# Altium PCB IRIS-FE-01-B.PcbDoc (part 1 of 2)
Units mil, origin at the board's own origin, x right, y up, seen from the top; angles counter-clockwise.
Board outline 2000 x 1540 mil, 6 copper layers (Top Layer 1, GND Plane 2, RF Layer 3, GND Plane 4, Signal Layer 5, Bottom Layer 6), stack 58.468 mil thick; 79 components, 85 nets, 421 pads, 413 vias.
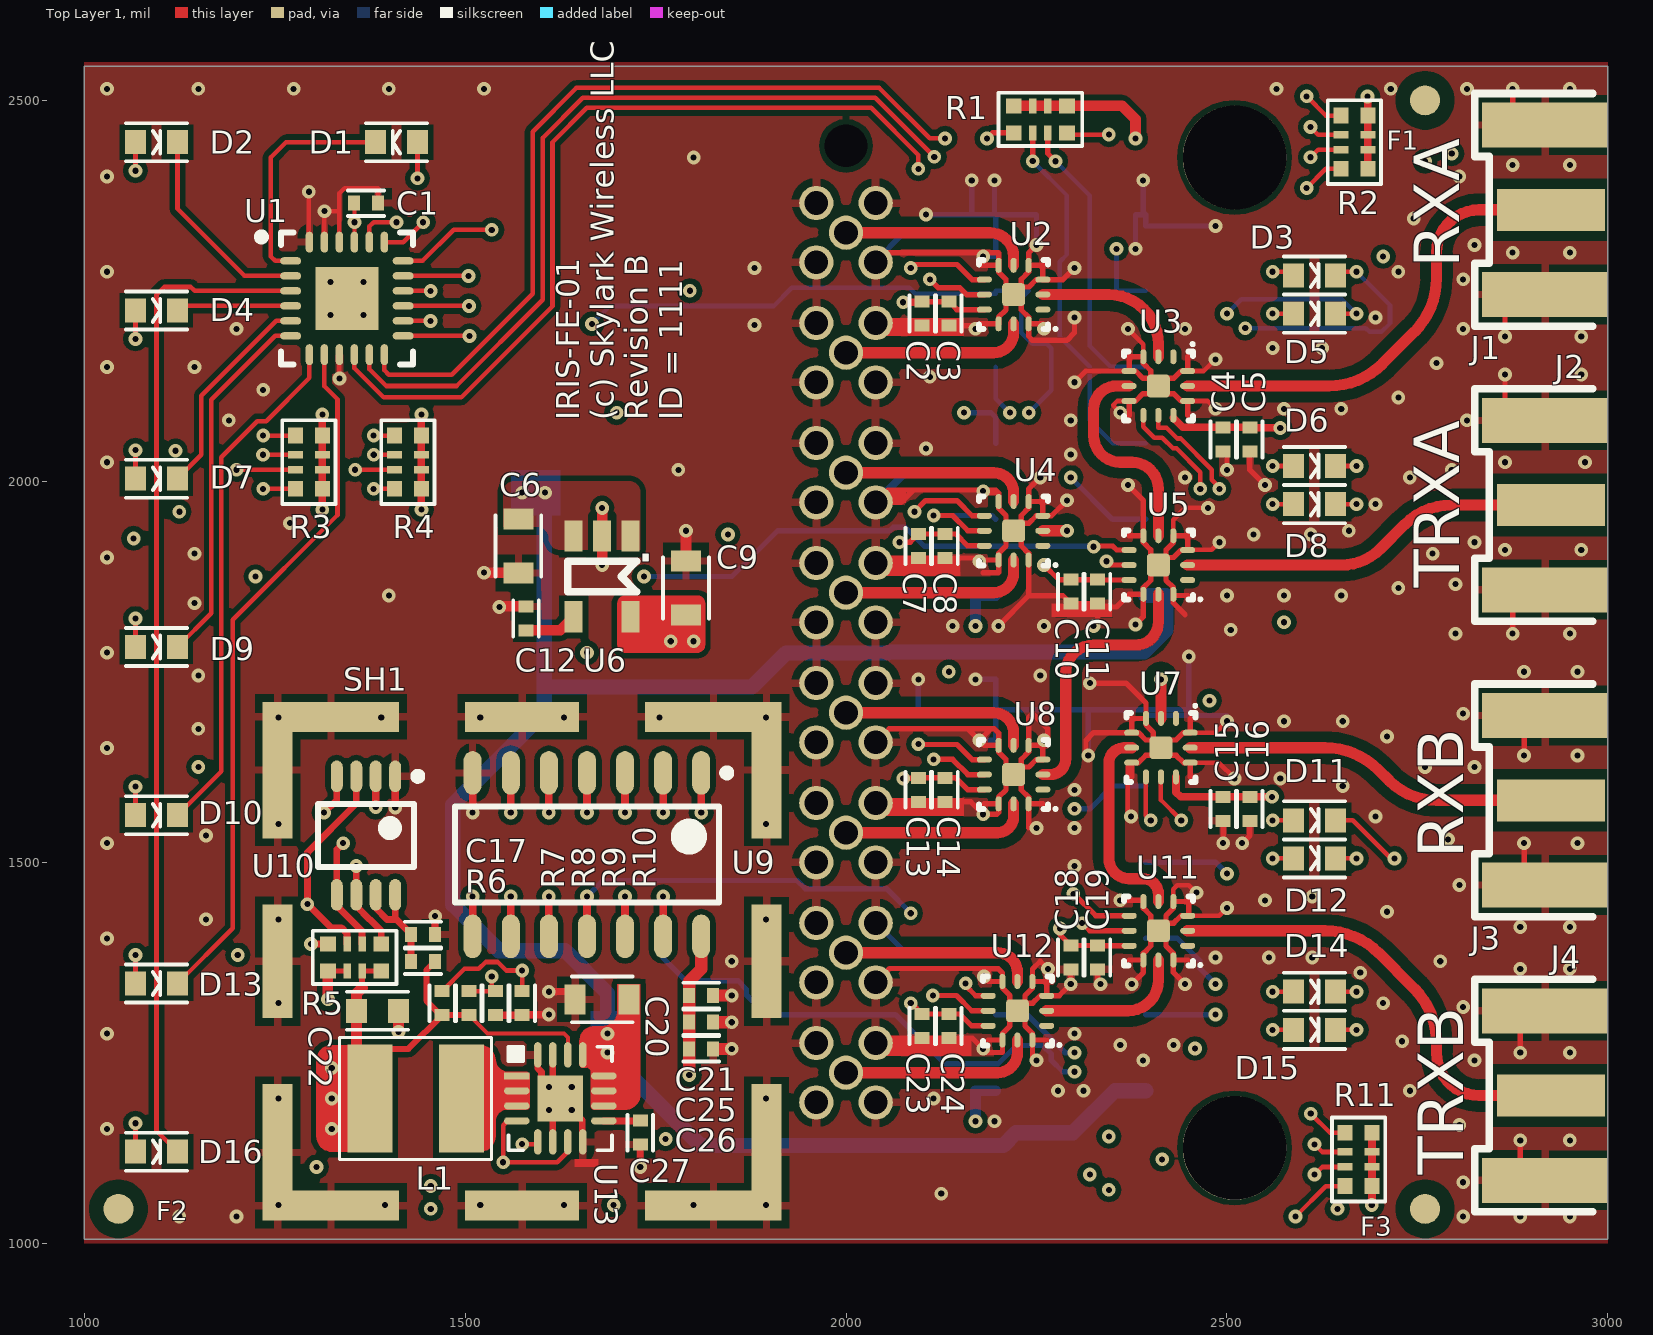
[diagram p0: Top Layer 1 view]
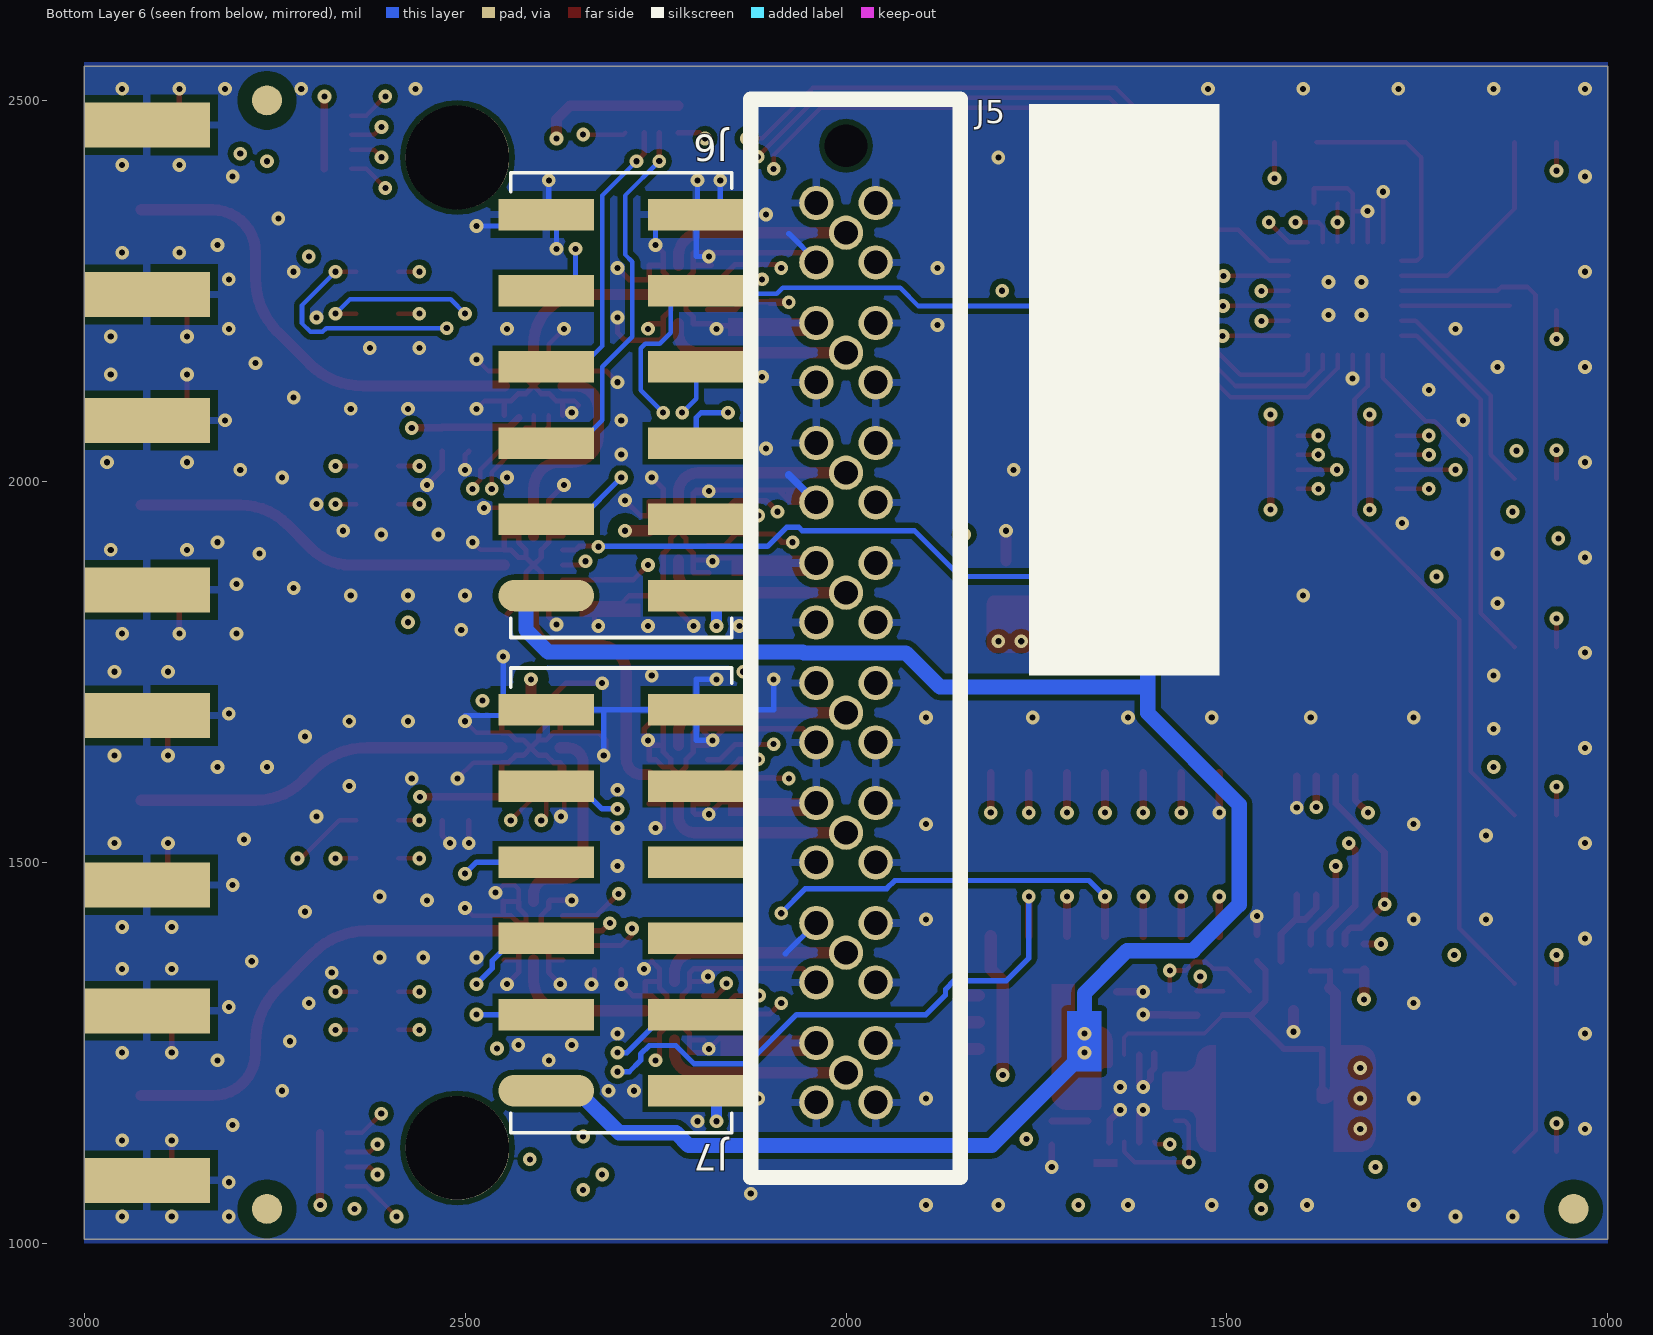
[diagram p1: Bottom Layer 6 view, seen from below]
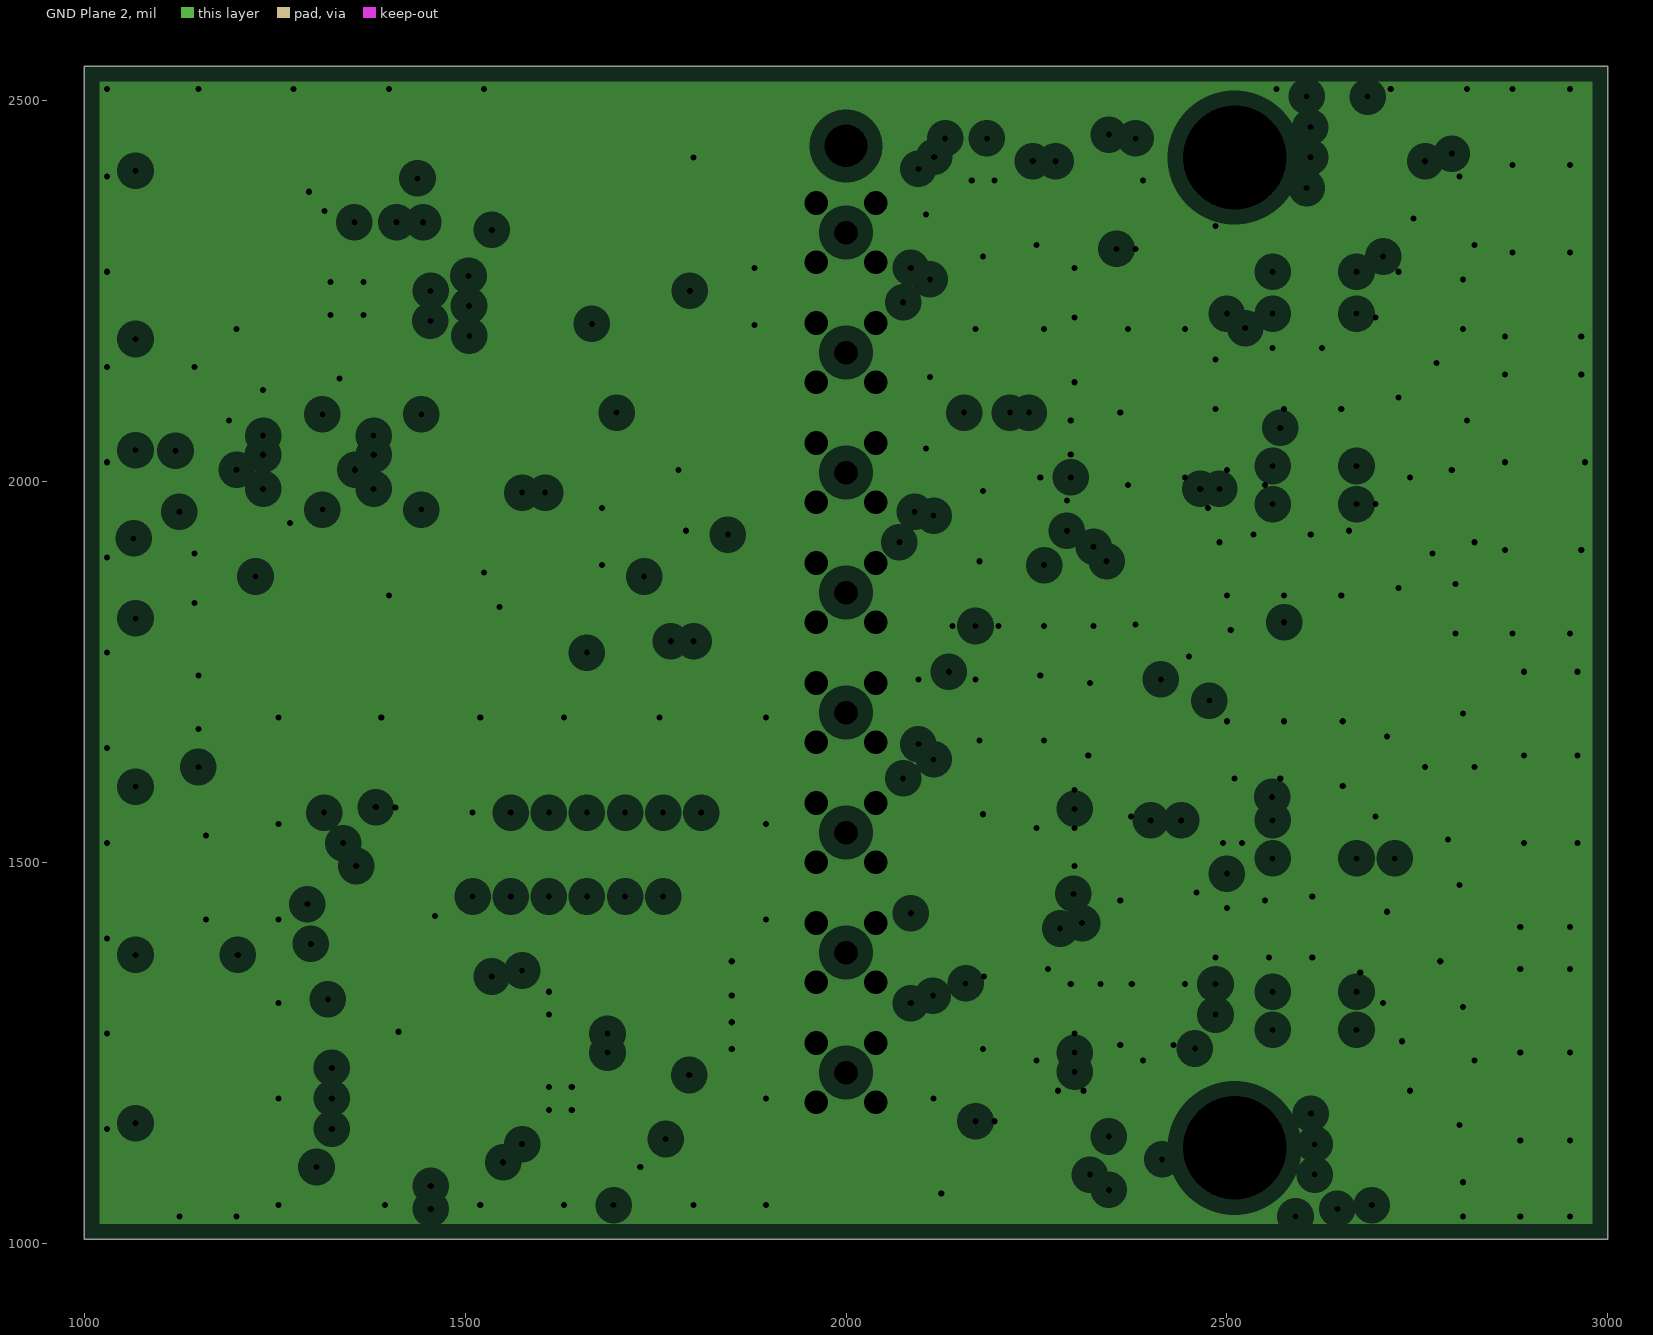
[diagram p2: GND Plane 2, clearances drawn from the general rule]
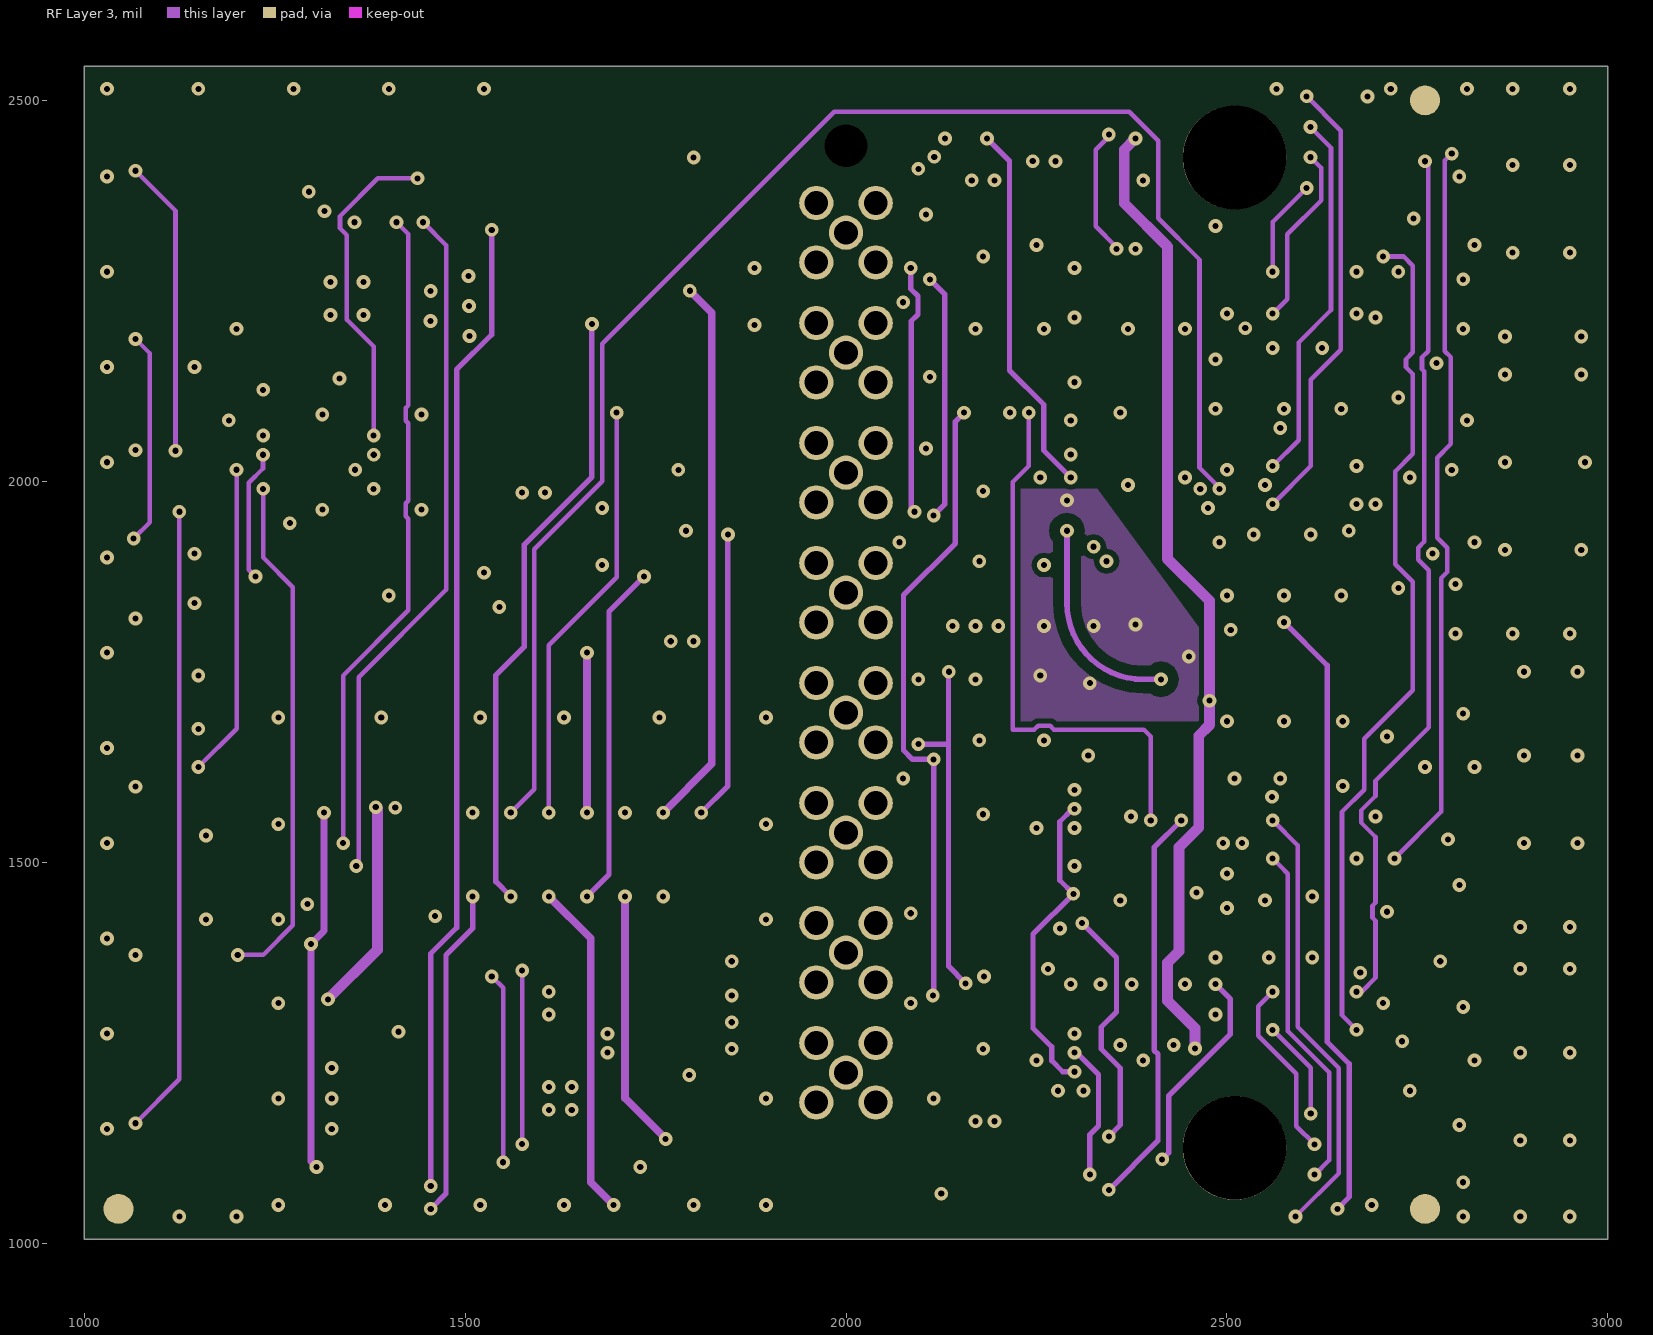
[diagram p3: RF Layer 3]
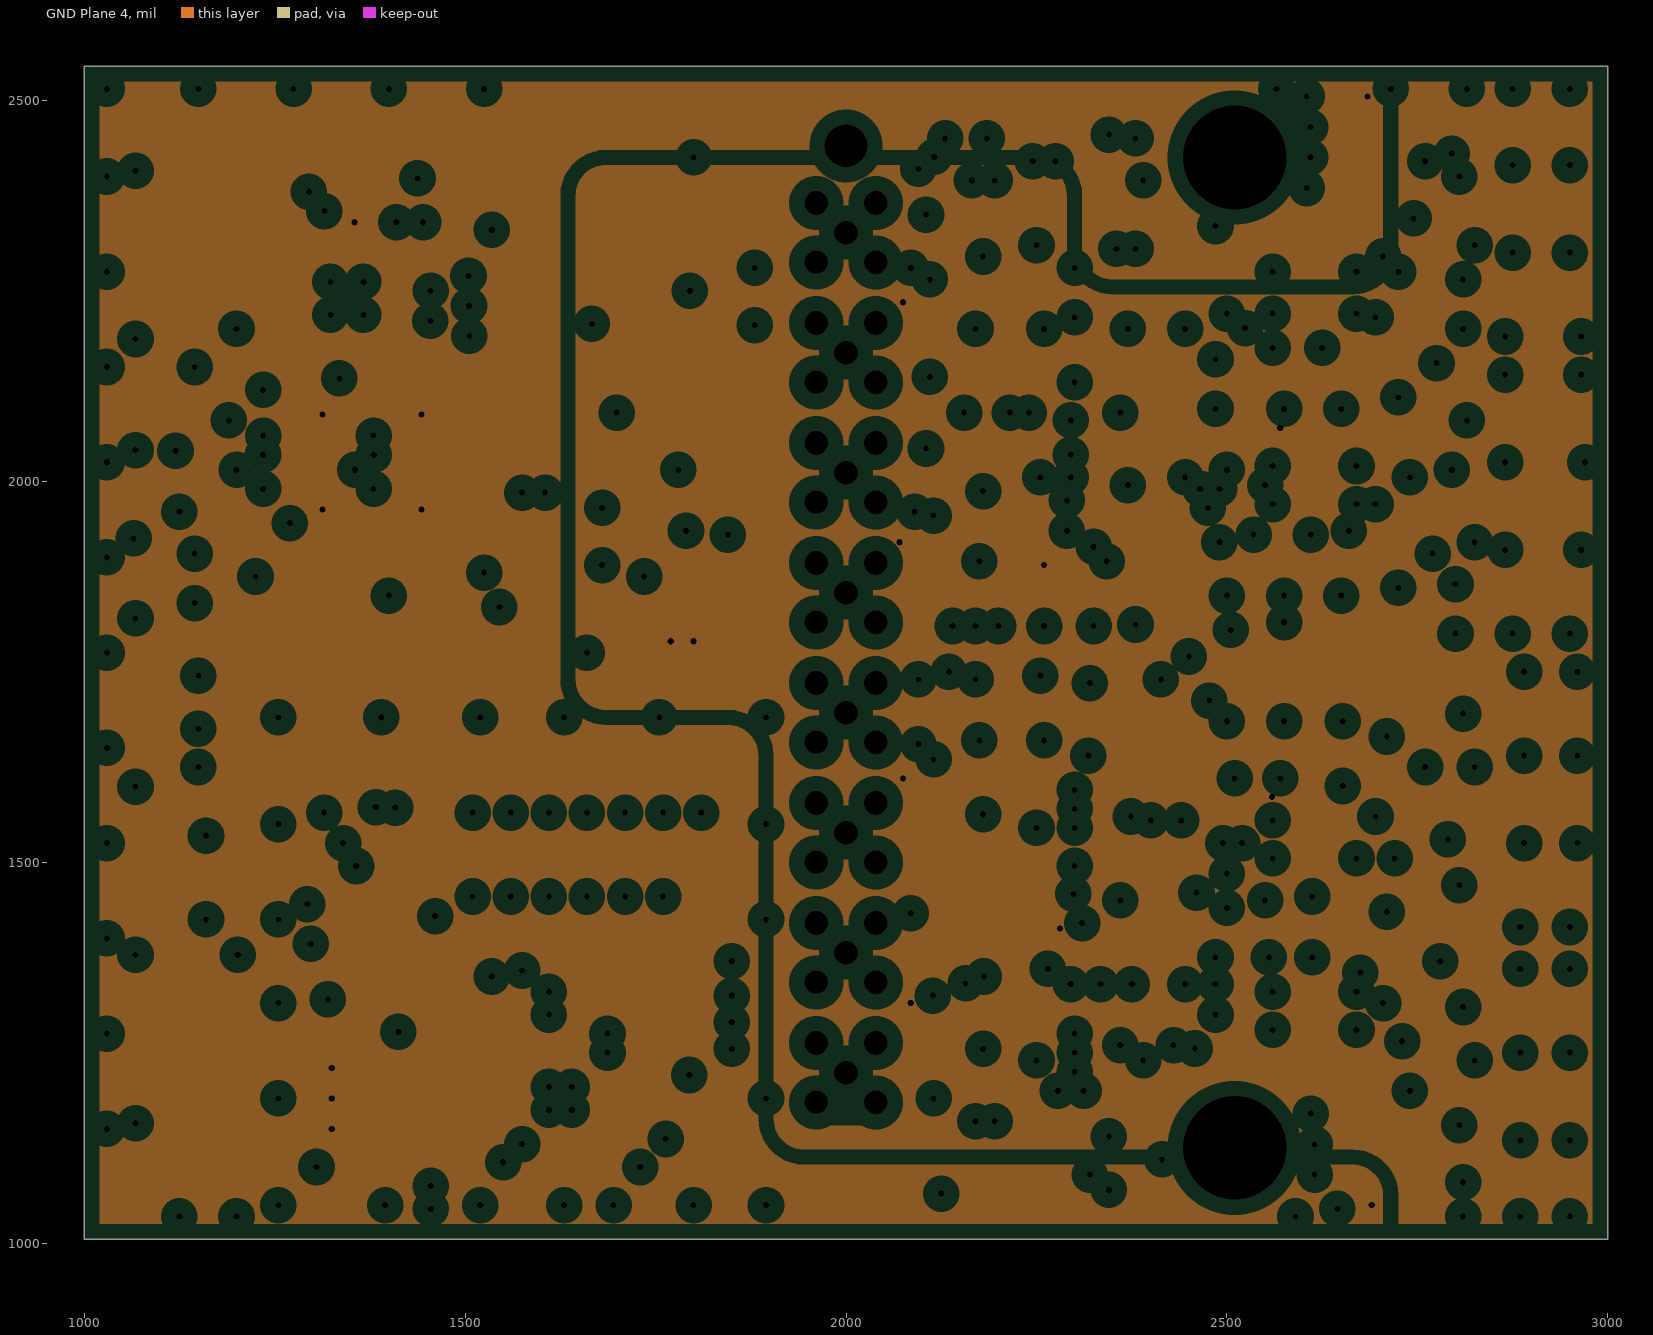
[diagram p4: GND Plane 4, clearances drawn from the general rule]
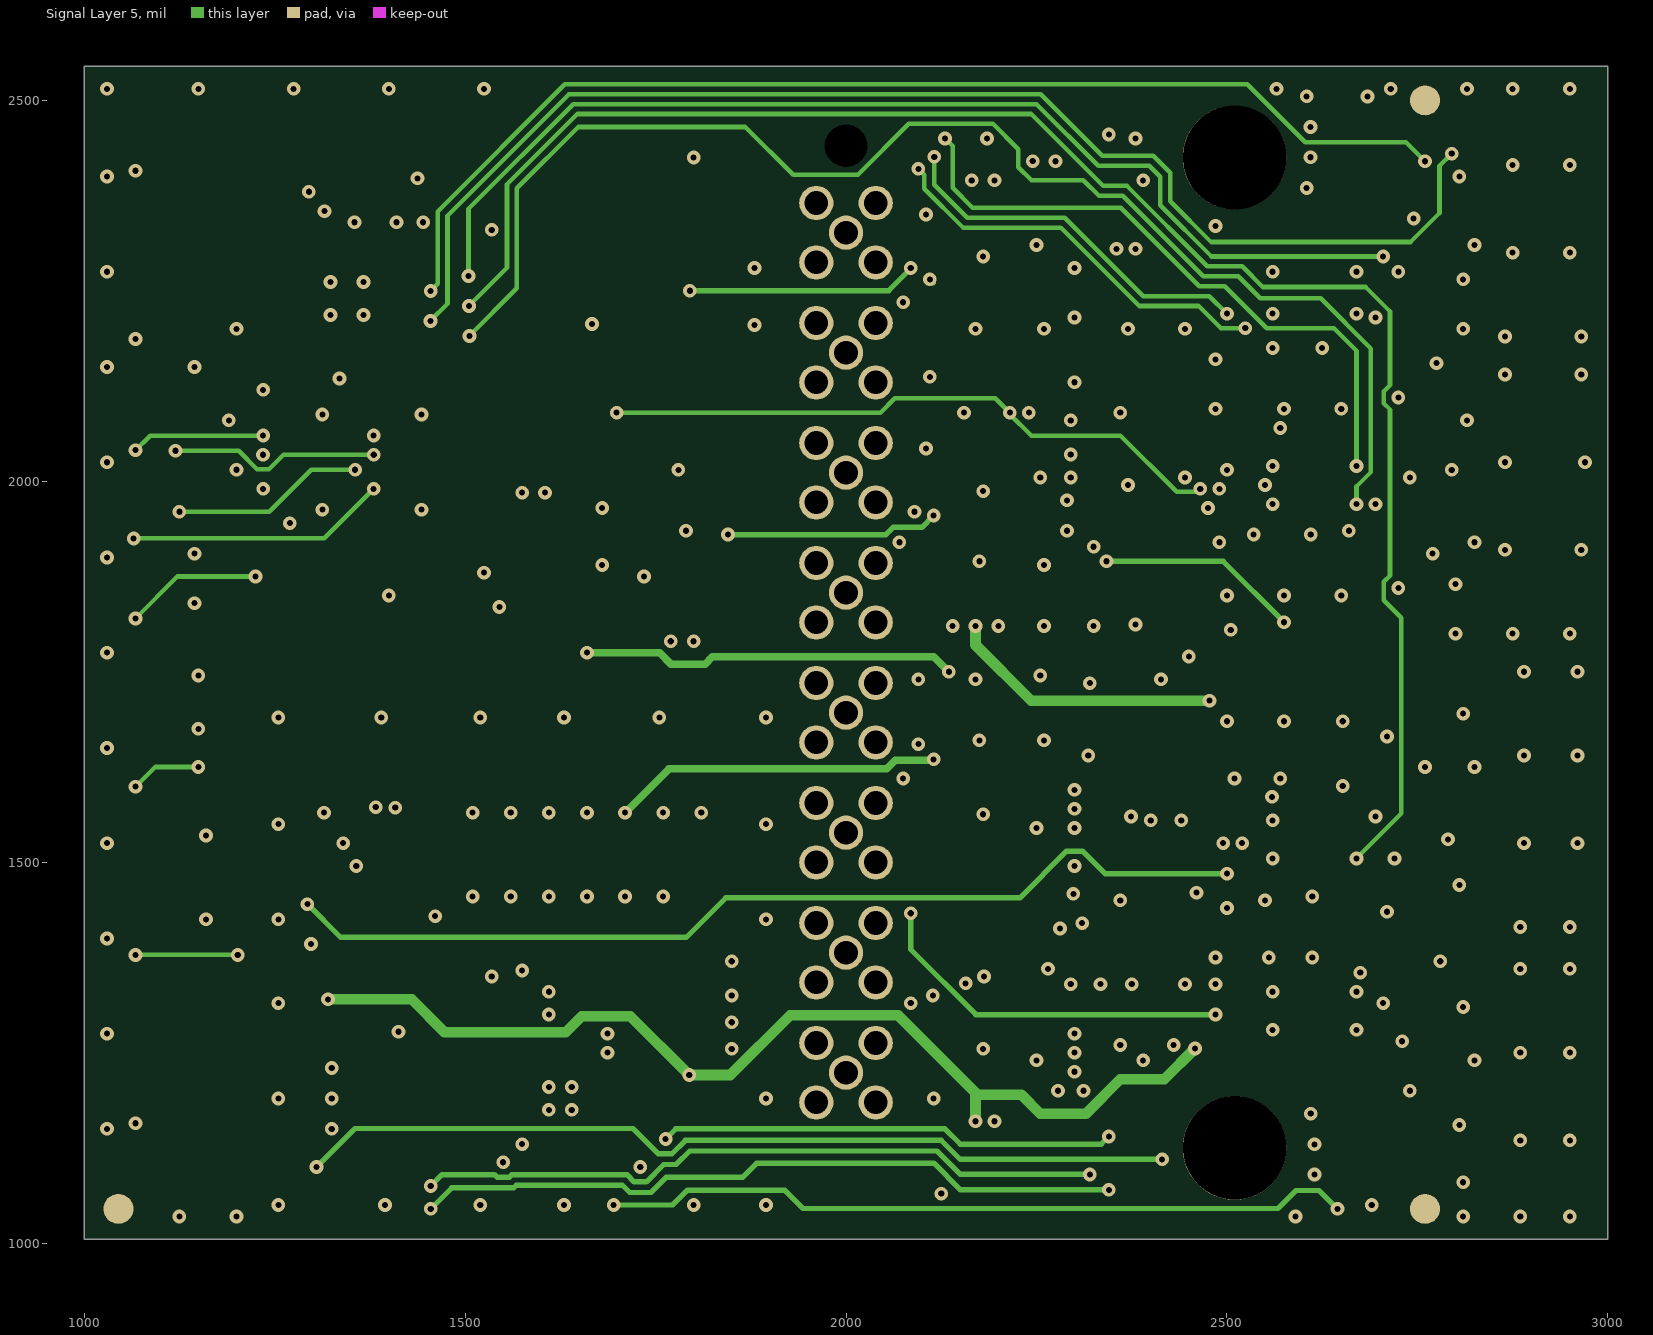
[diagram p5: Signal Layer 5]
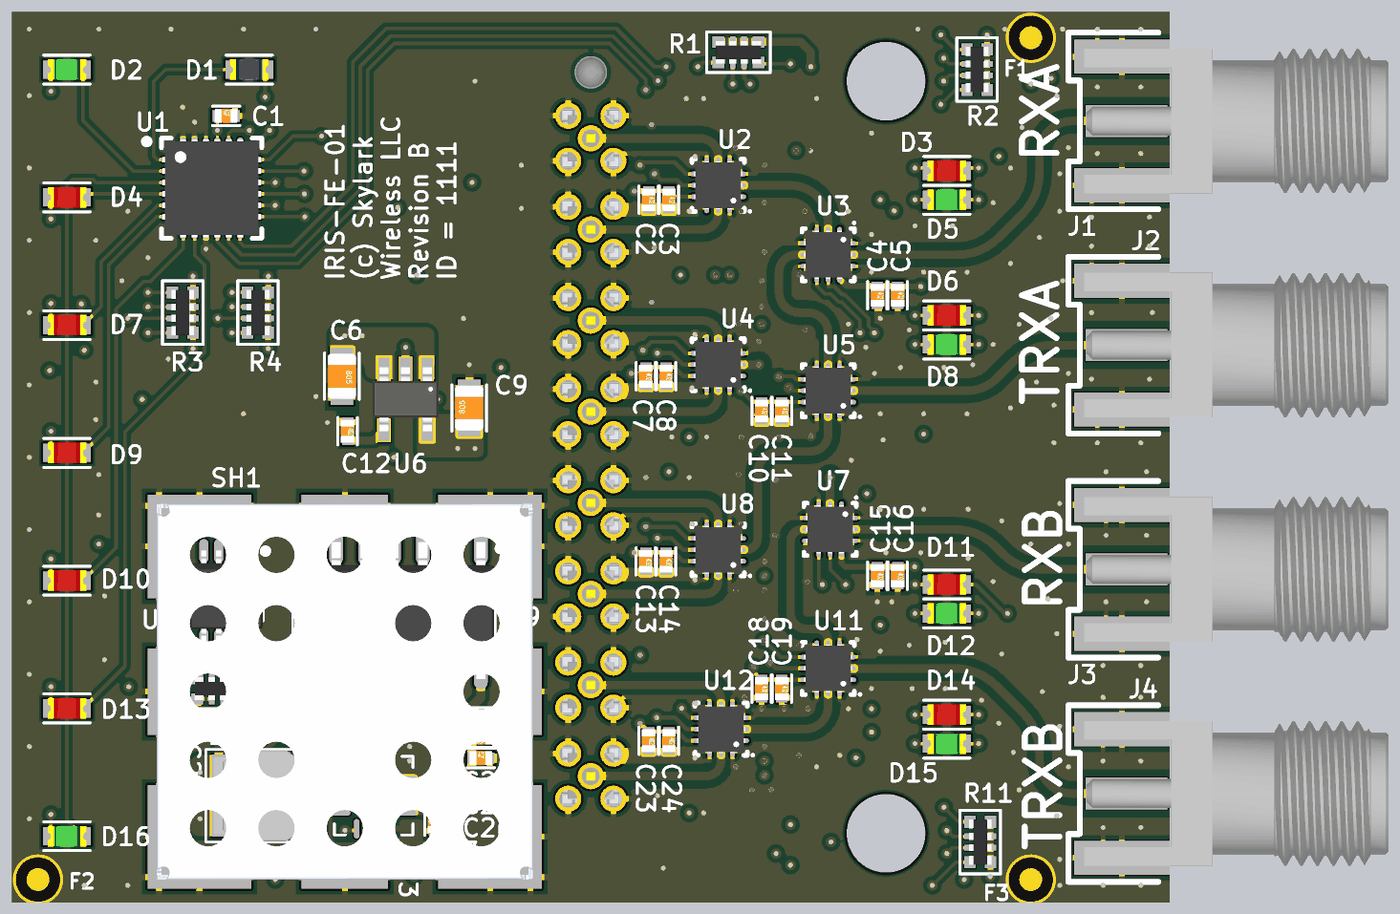
[diagram p7: 3D render of the assembled board from above, using the file's embedded part models]
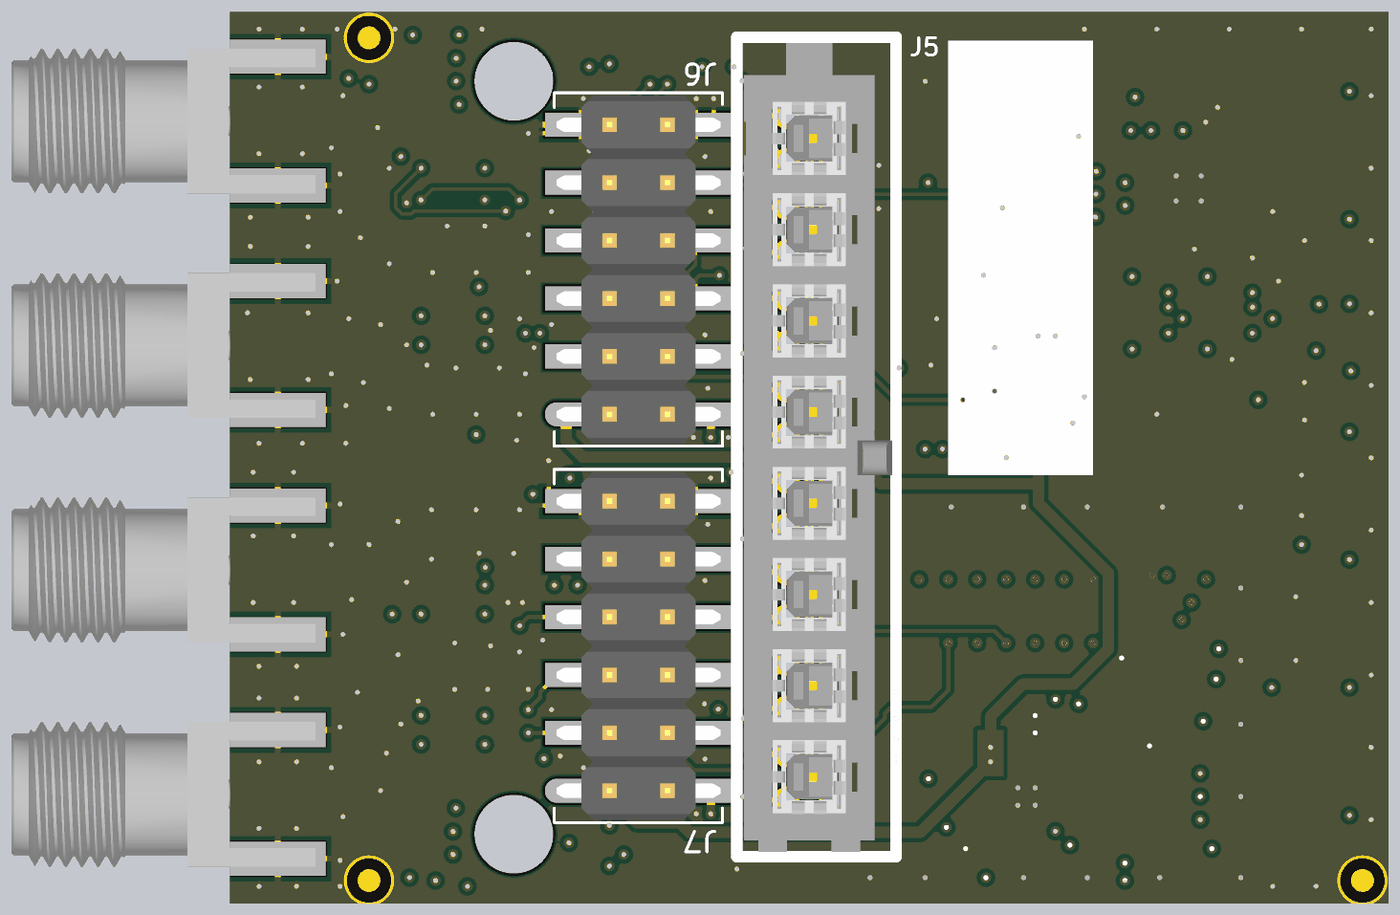
[diagram p8: 3D render of the assembled board from below, using the file's embedded part models]

## Layer stack, top to bottom
Top Solder: solder mask 0.4, Solder Resist, Dk 3.5
Top Layer 1: signal copper 1.4
Dielectric 1: prepreg 10, VT-47, Dk 4.2
GND Plane 2: plane copper 1.417, net GND
Dielectric 2: core 10, VT-47, Dk 4.2
RF Layer 3: signal copper 1.417
Dielectric 3: prepreg 10, VT-47, Dk 4.2
GND Plane 4: plane copper 1.417, net (Multiple Nets)
Dielectric 4: core 10, VT-47, Dk 4.2
Signal Layer 5: signal copper 1.417
Dielectric 5: prepreg 10, VT-47, Dk 4.2
Bottom Layer 6: signal copper 1.4
Bottom Solder: solder mask 0.4, Solder Resist, Dk 3.5

## Board outline
1000,1005 3000,1005 3000,2545 1000,2545

## Design rules (kind name [scope] priority, off if disabled: settings)
AcuteAngle [All] p1: minimum=6.00000000000000E+0001 checktracksonly=FALSE
Clearance Clearance_Pour2RF [InNetClass('RFTrace') vs InPolygon] p1: gap=14 ignorepadtopadclearanceinfootprint=FALSE except(0: Arc-Hole Track-Hole SMDPad-Hole THPad-Hole Via-Hole Fill-Hole Poly-Hole Region-Hole Text-Hole)
Clearance [All] p2: gap=7 ignorepadtopadclearanceinfootprint=FALSE except(0: Arc-Hole Track-Hole SMDPad-Hole THPad-Hole Via-Hole Fill-Hole Poly-Hole Region-Hole Text-Hole)
HoleSize HoleSize_8mil [All] p1: absolutevalues=TRUE maxlimit=200 minlimit=8 maxpercent=80.000 minpercent=20.000
HoleToHoleClearance [All] p1: gap=17 allowstackedmicrovias=TRUE
MinimumAnnularRing MinimumAnnularRing-5mil [All] p1: minimumring=5
MinimumSolderMaskSliver [All] p1: minsoldermaskwidth=2
PlaneClearance [All] p1: clearance=20
PlaneConnect PlaneConnect-Pads [IsComponent OR IsPad OR IsPad] p1: planeconnectstyle=Relief reliefexpansion=10 reliefentries=4 reliefconductorwidth=10 reliefairgap=7
PlaneConnect PlaneConnect_Vias [All] p2: planeconnectstyle=Direct reliefexpansion=20 reliefentries=4 reliefconductorwidth=10 reliefairgap=10
PolygonConnect PolygonConnect_GND [InNet('GND') vs IsComponent OR ispad] p1: connectstyle=Relief reliefconductorwidth=10 reliefentries=4 polygonreliefangle="90 Angle" airgapwidth=10
PolygonConnect [All] p2: connectstyle=Direct reliefconductorwidth=10 reliefentries=4 polygonreliefangle="90 Angle" airgapwidth=10
RoutingVias [All] p1: holewidth=8 width=18 viastyle="Through Hole" minholewidth=8 minwidth=18 maxholewidth=100 maxwidth=110
SilkToSilkClearance [All] p1: silktosilkclearance=2
SilkToSolderMaskClearance [IsPad] p1: minsilkscreentomaskgap=4 clearancetoexposedcopper=TRUE
SolderMaskExpansion [All] p1: expansion=4
Width Width_Power [InNetClass('PwrNet')] p1: maxlimit=100 minlimit=5 preferedwidth=10
Width Width_RF_50Ohm_BottomLayer [OnLayer('Bottom Layer 6') AND InNetClass('RFTrace')] p2: maxlimit=14.67 minlimit=7.45 preferedwidth=14.67 toplayer_minwidth=14.67 midlayer1_maxwidth=7.45 midlayer1_prefwidth=7.45 midlayer2_minwidth=14.65 midlayer2_maxwidth=14.65 midlayer2_prefwidth=14.65 bottomlayer_minwidth=14.67 minimp=50.000000 maximp=50.000000 favimp=50.000000
Width Width_RF_50Ohm_Default [InNetClass('RFTrace')] p3: maxlimit=33.41 minlimit=7.45 preferedwidth=33.41 toplayer_minwidth=14.67 toplayer_maxwidth=14.67 toplayer_prefwidth=14.67 midlayer1_maxwidth=7.45 midlayer1_prefwidth=7.45 midlayer2_minwidth=14.65 midlayer2_maxwidth=14.65 midlayer2_prefwidth=14.65 bottomlayer_minwidth=33.41 impedancedriven=TRUE minimp=50.000000 maximp=50.000000 favimp=50.000000
Width Width_Default [All] p4: maxlimit=30 minlimit=5 preferedwidth=14.67 midlayer1_prefwidth=7.45 midlayer2_prefwidth=14.65 minimp=50.000000 maximp=50.000000 favimp=50.000000
23 further rules are at their usual default settings.

## Classes and differential pairs
net class PwrNet: VCC_33 VCC_33_LED VIN
component class IRIS-FE-01-B: C1 C2 C3 C4 C5 C6 C7 C8 C9 C10 C11 C12 C13 C14 C15 C16 C17 C18 C19 C20 C21 C22 C23 C24 C25 C26 C27 C? F1 F2 F3 J1 J2 J3 J4 J5 J6 J7 L1 R1 R7 R8 R9 R10 SH1 U2 U3 U4 U5 U6 U7 U8 U9 U11 U12 U13
component class IRIS-FE-01-B-LEDs: C1 C17 D1 D2 D3 D4 D5 D6 D7 D8 D9 D10 D11 D12 D13 D14 D15 D16 R2 R3 R4 R5 R6 R10 R11 U1 U10
net class RFTrace: RF_RXA RF_RXA_C RF_RXB RF_RXB_C RF_TXA RF_TXB RFANT_RX_A RFANT_RX_B RFANT_TXRX_A RFANT_TXRX_B RXA_HI RXA_LO RXB_HI RXB_LO TXA_HI TXA_LO TXB_HI TXB_LO

## Components (designator, comment, footprint, x,y, rotation, side; value= is the part's Value field where it differs from the comment)
C1 "0402" 0402_SMT_CAP 1370,2365 r0 top (schematic designator C19)
C2 "0402 DNP" 0402_SMT_CAP 2100,2220 r270 top (schematic designator C12)
C3 "0402" 0402_SMT_CAP 2135,2220 r270 top (schematic designator C6)
C4 "0402" 0402_SMT_CAP 2495,2055 r270 top (schematic designator C5)
C5 "0402 DNP" 0402_SMT_CAP 2530,2055 r270 top (schematic designator C11)
C6 "0805 16V" 0805_SMT_CAP 1570,1915 r270 top (schematic designator C16)
C7 "0402 DNP" 0402_SMT_CAP 2095,1915 r270 top (schematic designator C10)
C8 "0402" 0402_SMT_CAP 2130,1915 r270 top (schematic designator C4)
C9 "0805 16V" 0805_SMT_CAP 1790,1860 r90 top (schematic designator C17)
C10 "0402 DNP" 0402_SMT_CAP 2295,1855 r270 top (schematic designator C9)
C11 "0402" 0402_SMT_CAP 2330,1855 r270 top (schematic designator C3)
C12 "0402 X7R" 0402_SMT_CAP 1580,1820 r270 top (schematic designator C18)
C13 "0402 DNP" 0402_SMT_CAP 2095,1595 r270 top (schematic designator C8)
C14 "0402" 0402_SMT_CAP 2130,1595 r270 top (schematic designator C2)
C15 "0402" 0402_SMT_CAP 2495,1570 r270 top (schematic designator C24)
C16 "0402 DNP" 0402_SMT_CAP 2530,1570 r270 top (schematic designator C26)
C17 "0402" 0402_SMT_CAP 1445,1405 r180 top (schematic designator C20)
C18 "0402 DNP" 0402_SMT_CAP 2295,1375 r270 top (schematic designator C27)
C19 "0402" 0402_SMT_CAP 2330,1375 r270 top (schematic designator C25)
C20 "0805 25V" 0805_SMT_CAP 1680,1320 r0 top (schematic designator C22)
C21 "0402" 0402_SMT_CAP 1810,1325 r0 top (schematic designator C15)
C22 "0603 6.3V" 0603_SMT_CAP 1385,1305 r0 top (schematic designator C21)
C23 "0402 DNP" 0402_SMT_CAP 2100,1285 r270 top (schematic designator C7)
C24 "0402" 0402_SMT_CAP 2135,1285 r270 top (schematic designator C1)
C25 "0402" 0402_SMT_CAP 1810,1290 r180 top (schematic designator C14)
C26 "0402" 0402_SMT_CAP 1810,1255 r0 top (schematic designator C13)
C27 "0402" 0402_SMT_CAP 1730,1145 r90 top (schematic designator C23)
D1 "0603 LED Blue" 0603_SMT_LED_Blue 1410,2445 r180 top
D2 "0603 LED Green" 0603_SMT_LED_Green 1095,2445 r0 top (schematic designator D15)
D3 "0603 LED Red" 0603_SMT_LED_Red 2615,2270 r0 top
D4 "0603 LED Red" 0603_SMT_LED_Red 1095,2224.17 r0 top (schematic designator D2)
D5 "0603 LED Green" 0603_SMT_LED_Green 2615,2220 r0 top
D6 "0603 LED Red" 0603_SMT_LED_Red 2615,2020 r0 top (schematic designator D8)
D7 "0603 LED Red" 0603_SMT_LED_Red 1095,2003.33 r0 top (schematic designator D4)
D8 "0603 LED Green" 0603_SMT_LED_Green 2615,1970 r0 top (schematic designator D10)
D9 "0603 LED Red" 0603_SMT_LED_Red 1095,1782.5 r0 top (schematic designator D6)
D10 "0603 LED Red" 0603_SMT_LED_Red 1095,1561.67 r0 top (schematic designator D7)
D11 "0603 LED Red" 0603_SMT_LED_Red 2615,1555 r0 top
D12 "0603 LED Green" 0603_SMT_LED_Green 2615,1505 r0 top
D13 "0603 LED Red" 0603_SMT_LED_Red 1095,1340.83 r0 top (schematic designator D9)
D14 "0603 LED Red" 0603_SMT_LED_Red 2615,1330 r0 top (schematic designator D13)
D15 "0603 LED Green" 0603_SMT_LED_Green 2615,1280 r0 top (schematic designator D14)
D16 "0603 LED Green" 0603_SMT_LED_Green 1095,1120 r0 top
F1 "Fiducial Mark 1mm" 1mm_FIDUCIAL#1 2865,2520 r0 top
F2 "Fiducial Mark 1mm" 1mm_FIDUCIAL#2 1045,1045 r0 top
F3 "Fiducial Mark 1mm" 1mm_FIDUCIAL#2 2760,1045 r0 top
J1 "50 Ohm Edge Mount" SMA-J-P-X-ST-EM1 3000,2356.25 r90 top locked
J2 "50 Ohm Edge Mount" SMA-J-P-X-ST-EM1 3000,1968.75 r90 top locked
J3 "50 Ohm Edge Mount" SMA-J-P-X-ST-EM1 3000,1581.25 r90 top locked
J4 "50 Ohm Edge Mount" SMA-J-P-X-ST-EM1 3000,1193.75 r90 top locked
J5 "IJ5 Coax Jack 8-pos" IJ5-08-05.0-L-S-1-TR 2000,2326.24 r270 bottom locked
J6 "2x6 2.54mm HDR" M20-876-350012 2295,2100 r270 bottom locked
J7 "2x6 2.54mm HDR" M20-876-350012 2295,1450 r270 bottom locked
L1 "SRN4018 3A" srn4018 1435,1190 r180 top
R1 "0402 Array" EXB28V 2255,2475 r0 top (schematic designator R2)
R2 "0402 Array" EXB28V 2667.28,2445.06 r270 top (schematic designator R6)
R3 "0402 Array" EXB28V 1295,2025 r270 top (schematic designator R5)
R4 "0402 Array" EXB28V 1425,2025 r270 top
R5 "0402 Array" EXB28V 1355,1375 r0 top (schematic designator R10)
R6 "0402" 0402_SMT_RES 1445,1370 r0 top (schematic designator R9)
R7 "0402 1%" 0402_SMT_RES 1470,1315 r270 top (schematic designator R2)
R8 "0402" 0402_SMT_RES 1505,1315 r270 top (schematic designator R1)
R9 "0402" 0402_SMT_RES 1540,1315 r90 top (schematic designator R3)
R10 "0402 1%" 0402_SMT_RES 1575,1315 r90 top (schematic designator R7)
R11 "0402 Array" EXB28V 2672.72,1109.84 r270 top (schematic designator R8)
SH1 "0.65 x 0.65 x 0.142\"" BMIS-202 1575,1370 r0 top (schematic designator SH2)
U1 "LP3943" TI-QFN127P600-8N 1345,2240 r0 top (schematic designator U11)
U2 "0.3-6 GHz SPDT" SKY13374-397LF-QFN12 2220,2245 r180 top
U3 "0.3-6 GHz SPDT" SKY13374-397LF-QFN12 2410,2125 r270 top (schematic designator U1)
U4 "0.3-6 GHz SPDT" SKY13374-397LF-QFN12 2220,1935 r180 top
U5 "0.3-6 GHz SPDT" SKY13374-397LF-QFN12 2410,1890 r180 top (schematic designator U3)
U6 "LP2985IM5-3.3" DBV_SOT-23-5 1680,1875 r180 top (schematic designator U10)
U7 "0.3-6 GHz SPDT" SKY13374-397LF-QFN12 2413.39,1650.32 r270 top (schematic designator U5)
U8 "0.3-6 GHz SPDT" SKY13374-397LF-QFN12 2220,1615 r180 top (schematic designator U6)
U9 "CD74AC14M" TI-SOIC127P600X175-14N 1660,1510 r270 top
U10 "PCA9306DCT" TI-SOP127P600-8N 1370,1535 r270 top (schematic designator U12)
U11 "0.3-6 GHz SPDT" SKY13374-397LF-QFN12 2410,1410 r180 top (schematic designator U8)
U12 "0.3-6 GHz SPDT" SKY13374-397LF-QFN12 2225,1305 r180 top (schematic designator U7)
U13 "4-17V 3A" S-PVQFN-N16 1625,1190 r0 top

## Footprints (in the part's own frame and the unit in brackets; to place one, negate y for a bottom-side part, rotate by r counter-clockwise, add the part's x,y. Pads: shape width x height; smd on the part's side, far side on the other; paste and mask are expansions set on the pad)
1mm_FIDUCIAL#1 [mil] "Fiducial Mark"
  round 39.37 all layers, no hole paste-19.68 mask+23.62: 0(-105,-20)
1mm_FIDUCIAL#2 [mil] "Fiducial Mark"
  round 39.37 all layers, no hole paste-19.68 mask+23.62: 0(0,0)
0402_SMT_CAP [mm] "0402 Chip Cap, Res, Ind"
  rect 0.4x0.5 smd: 1(-0.4,0) 2(0.4,0)
  silkscreen extent -0.6,-0.43 0.6,0.43, body extent -0.5,-0.3 0.5,0.3, height 0.21
0402_SMT_RES [mm] "0402 Imperial Surface Mount Resistor"
  rect 0.4x0.5 smd: 1(-0.4,0) 2(0.4,0)
  silkscreen extent -0.6,-0.43 0.6,0.43, body extent -0.51,-0.3 0.49,0.3, height 0.21
0603_SMT_CAP [mm] "0603 Chip Cap"
  rect 0.7x0.8 smd: 1(-0.7,0) 2(0.7,0)
  silkscreen extent -1.02,-0.64 1.02,0.64, body extent -0.8,-0.4 0.8,0.4, height 0.31
0603_SMT_LED_Blue [mm] "0603 Chip LED with Polar Placement Marks - Blue"
  rect 0.7x0.8 smd: 1(-0.7,0) 2(0.7,0)
  silkscreen extent -1.02,-0.64 1.02,0.64, body extent -0.85,-0.45 0.85,0.45, height 0.9
0603_SMT_LED_Green [mm] "0603 Chip LED with Polar Placement Marks - GREEN"
  rect 0.7x0.8 smd: 1(-0.7,0) 2(0.7,0)
  silkscreen extent -1.02,-0.64 1.02,0.64, body extent -0.85,-0.45 0.85,0.45, height 0.9
0603_SMT_LED_Red [mm] "0603 Chip LED with Polar Placement Marks - RED"
  rect 0.7x0.8 smd: 1(-0.7,0) 2(0.7,0)
  silkscreen extent -1.02,-0.64 1.02,0.64, body extent -0.85,-0.45 0.85,0.45, height 0.9
0805_SMT_CAP [mm] "0805 Chip Capacitor"
  rect 0.7x1 smd: 1(-0.9,0) 2(0.9,0)
  silkscreen extent -1.02,-0.76 1.02,0.76, body extent -1,-0.62 1,0.63, height 0.79
BMIS-202 [mm] "LairdTech BMI-S-202-F Two-piece Shield, 0.65x0.65x0.142\""
  rect 1x4.55 smd: SH(-8.15,-6.375) SH(-8.15,6.375) SH(8.15,-6.375) SH(8.15,6.375)
  rect 1x3.8 smd: SH(-8.15,0) SH(8.15,0)
  rect 4.55x1 smd: SH(-6.375,-8.15) SH(-6.375,8.15) SH(6.375,-8.15) SH(6.375,8.15)
  rect 3.8x1 smd: SH(0,-8.15) SH(0,8.15)
  body extent -8.25,-8.25 8.25,8.25, height 3.61
DBV_SOT-23-5 [mm] "TI DBV Package for Low-Power Single-Gate Inverter"
  rect 0.6x1.05 smd paste-0.05 mask+0.07: 1(-0.95,-1.35) 2(0,-1.35) 3(0.95,-1.35) 4(0.95,1.35) 5(-0.95,1.35)
  silkscreen extent -1.14,-0.51 1.14,0.51, body extent -1.45,-1.41 1.45,1.41, height 1.45
EXB28V [mm] "Panasonic 4x0402 Convex Resistor Array"
  rect 0.525x0.5 smd mask+0.05: 1(-0.887,0.45) 4(0.887,0.45) 5(0.887,-0.45) 8(-0.887,-0.45)
  rect 0.25x0.5 smd mask+0.05: 2(-0.25,0.45) 3(0.25,0.45) 6(0.25,-0.45) 7(-0.25,-0.45)
  silkscreen extent -1.4,-0.89 1.4,0.89, body extent -1,-0.5 1,0.5, height 0.45
IJ5-08-05.0-L-S-1-TR [mil] "Samtec 50 Ohm High-Isolation RF Jack, 8-POS, Single Row"
  round 45 hole 31: 1(0,0) 2(157.5,0) 3(315,0) 4(472.5,0) 5(630,0) 6(787.5,0) 7(945,0) 8(1102.5,0) GND(-39,-39) GND(-39,39) GND(39,-39) GND(39,39) GND(118.5,-39) GND(118.5,39) GND(196.5,-39) GND(196.5,39) GND(276,-39) GND(276,39) GND(354,-39) GND(354,39) GND(433.5,-39) GND(433.5,39) GND(511.5,-39) GND(511.5,39) GND(591,-39) GND(591,39) GND(669,-39) GND(669,39) GND(748.5,-39) GND(748.5,39) GND(826.5,-39) GND(826.5,39) GND(906,-39) GND(906,39) GND(984,-39) GND(984,39) GND(1063.5,-39) GND(1063.5,39) GND(1141.5,-39) GND(1141.5,39)
  round 0 hole 56 unplated: ""(-114,0)
  silkscreen extent -175,-125 1240,150, body extent -164,-113 1232,143, height 297
M20-876-350012 [mm] "Harwin M20 DIL SMT Straight 2.54mm Header"
  oval 1.05x3.2 smd: 1(6.35,-2.5)
  rect 1.05x3.2 smd: 2(3.81,-2.5) 3(1.27,-2.5) 4(-1.27,-2.5) 5(-3.81,-2.5) 6(-6.35,-2.5) 7(6.35,2.5) 8(3.81,2.5) 9(1.27,2.5) 10(-1.27,2.5) 11(-3.81,2.5) 12(-6.35,2.5)
  silkscreen extent -7.75,-3.68 7.75,3.68, body extent -7.62,-3.59 7.62,3.61, height 9.94
S-PVQFN-N16 [mm] "QFN, 16-Leads, Body 3.00x3.00mm, Pitch 0.50mm, Thermal Pad 1.66x1.66mm, IPC Medium Density"
  rect 0.85x0.24 smd mask+0.076: 1(-1.45,0.75)
  oval 0.85x0.24 smd mask+0.076: 2(-1.45,0.25) 3(-1.45,-0.25) 4(-1.45,-0.75) 9(1.45,-0.75) 10(1.45,-0.25) 11(1.45,0.25) 12(1.45,0.75)
  oval 0.24x0.85 smd mask+0.076: 5(-0.75,-1.45) 6(-0.25,-1.45) 7(0.25,-1.45) 8(0.75,-1.45) 13(0.75,1.45) 14(0.25,1.45) 15(-0.25,1.45) 16(-0.75,1.45)
  rect 1.524x1.524 smd mask+0.076: 17(0,0)
  silkscreen extent -1.73,-1.73 1.73,1.73, body extent -1.58,-1.58 1.58,1.58, height 1
SKY13374-397LF-QFN12 [mm] "SKY13374-397LF SPDT 2x2mm QFN12"
  oval 0.5x0.2 smd: 1(-0.975,0.5) 2(-0.975,0) 3(-0.975,-0.5) 7(0.975,-0.5) 8(0.975,0) 9(0.975,0.5)
  oval 0.2x0.5 smd: 4(-0.5,-0.975) 5(0,-0.975) 6(0.5,-0.975) 10(0.5,0.975) 11(0,0.975) 12(-0.5,0.975)
  rrect30% 0.76x0.76 smd: 13(0,0)
  silkscreen extent -1.45,-1.15 1.15,1.19, body extent -1.05,-1.05 1.05,1.05, height 0.6
SMA-J-P-X-ST-EM1 [mm]
  rect 1.4x3.6 smd mask+0.05: 1(0,1.9)
  rect 1.5x4.2 smd mask+0.05: 2(-2.825,2.1) 2(2.825,2.1)
  rect 1.5x4.2 smd far side mask+0.05: 2(-2.825,2.1) 2(2.825,2.1)
  silkscreen extent -3.88,0.5 3.88,4.44, body extent -3.17,-9.59 3.17,3.74, height 3.82
srn4018 [mm] "Bourns SRN4018 Series SMT Semi-Shielded Power Inductor"
  rect 1.5x3.6 smd: 1(-1.525,0) 2(1.525,0)
  silkscreen extent -2.54,-2.03 2.54,2.03, body extent -2.2,-2 2.2,2, height 1.81
TI-QFN127P600-8N [mm] "TI RTW0024C Package for LP3943 LED Driver"
  oval 0.7x0.25 smd mask+0.08: 1(-1.875,1.25) 2(-1.875,0.75) 3(-1.875,0.25) 4(-1.875,-0.25) 5(-1.875,-0.75) 6(-1.875,-1.25) 13(1.875,-1.25) 14(1.875,-0.75) 15(1.875,-0.25) 16(1.875,0.25) 17(1.875,0.75) 18(1.875,1.25)
  oval 0.25x0.7 smd mask+0.08: 7(-1.25,-1.875) 8(-0.75,-1.875) 9(-0.25,-1.875) 10(0.25,-1.875) 11(0.75,-1.875) 12(1.25,-1.875) 19(1.25,1.875) 20(0.75,1.875) 21(0.25,1.875) 22(-0.25,1.875) 23(-0.75,1.875) 24(-1.25,1.875)
  rect 2.1x2.1 smd: 25(0,0)
  silkscreen extent -2.97,-2.2 2.2,2.2, body extent -2.15,-2.15 2.15,2.15, height 0.8
TI-SOIC127P600X175-14N [mm] "SOIC14 for TI R-PDSO-G14 Pkg, Pitch 1.27mm, IPC Medium Density"
  oval 1.45x0.6 smd: 1(-2.725,3.81) 2(-2.725,2.54) 3(-2.725,1.27) 4(-2.725,0) 5(-2.725,-1.27) 6(-2.725,-2.54) 7(-2.725,-3.81) 8(2.725,-3.81) 9(2.725,-2.54) 10(2.725,-1.27) 11(2.725,0) 12(2.725,1.27) 13(2.725,2.54) 14(2.725,3.81)
  silkscreen extent -2.85,-4.4 1.6,4.79, body extent -3,-4.4 3,4.4, height 1.75
TI-SOP127P600-8N [mm] "TI-DCT-R-PDSO-G8 PSOP for TI PCA9306"
  oval 1.05x0.4 smd mask+0.08: 1(-1.975,0.975) 2(-1.975,0.325) 3(-1.975,-0.325) 4(-1.975,-0.975) 5(1.975,-0.975) 6(1.975,-0.325) 7(1.975,0.325) 8(1.975,0.975)
  silkscreen extent -2.1,-1.6 1.05,1.85, body extent -2,-1.6 2,1.6, height 1.3

## Part data
C1 C2 C3 C4 C5 C7 C8 C10 C11 C13 C14 C15 C16 C17 C18 C19 C21 C23 C24 C25 C26 C27: library part Cap_0402, "0402 SMT Capacitor"
C6 C9 C20: library part Cap_0805, "0805 SMT Capacitor"
C12: library part "Cap Semi", "Capacitor (Semiconductor SIM Model)"
C22: library part Cap_0603, "0603 SMT Capacitor"
D1: library part LED_0603_BLUE, "0603 LED with Polar Markings"
D2 D5 D8 D12 D15 D16: library part LED_0603_GREEN, "0603 LED with Polar Markings"
D3 D4 D6 D7 D9 D10 D11 D13 D14: library part LED_0603_RED, "0603 LED with Polar Markings"
F1 F2 F3: library part Fiducial-1mm
J1 J2 J3 J4: library part SMA-J-P-X-ST-EM1, "Samtec SMA Edge Mount 50 Ohm"
J5: library part IJ5-08-05.0-X-S-1_1, "Samtec 50 Ohm High Isolation RF Jack, 4-pos"
J6 J7: library part M20-8760642, "Harwin 2.54mm Thru Straight Recepticle"
L1: library part SRN4018, "SRN4018 Semi-Shielded SMT Power Inductor"
R1 R2 R3 R4 R5 R11: library part Res_0402_4xArray, "0402 SMT Resistor Array"
R6 R7 R8 R9 R10: library part Res_0402, "0402 SMT Resistor"
SH1: library part BMI-S-202-F, "EMI Shield 0.65 x 0.65 x 0.142\" LairdTech 2-pc"
U1: "TI 16-LED Fun Light Driver with I2C"
U2 U3 U4 U5 U7 U8 U11 U12: library part SKY13374-397LF, "300 kHz to 6.0 GHz SPDT Switch 2x2mm QFN"
U6: "TO LDO 3.3V 150mA Regulator w/ ON/OFF"
U9: "TI Hex Inverter in SOIC"
U10: "TI I2C Bidirectional Voltage Translator"
U13: library part TLV62130, "4-17V 3A Step-Down Voltage Converter"

## Free pads (board coordinates)
  round 136 hole 136 unplated: 0(2510,2425) 1(2510,1125)

## Via types
v1: diameter 18, hole 8, Top Layer 1 to Bottom Layer 6, tented both sides, 409 vias
v2: diameter 18, hole 8, Top Layer 1 to Bottom Layer 6, tented bottom, 4 vias

## Nets (pads, with @x,y where several pads share a name; then routed paths per layer and width w, separated by ;. In a path a pad name is that pad's centre, name@x,y a point inside that pad or via, vN(x,y) a via of type N, cw(c..) or ccw(c..) an arc to the next point about the centre after c; other vN are vias at no path point)
\CTRL_FDDEN_CHA: U3.8 U9.6 | length 2218
  Top Layer 1 w6: U3.8@2410,2086.61 2410,2070 2420.68,2070 2434.57,2056.11 2439.14,2056.11 2480,2015.25 2480,2001.87 2490,1991.87 v1(2490,1990)
  Top Layer 1 w10: v1(1560,1565) U9.6@1560,1617.28
  RF Layer 3 w6: v1(1560,1565) 1591,1596 1591,1911 1680,2000 1680,2180.25 1984.75,2485 2371.87,2485 2410,2446.87 2410,2345 2464,2291 2464,2017.87 2490,1991.87 v1(2490,1990)
\CTRL_FDDEN_CHB: U7.8 U9.8 | length 2018.7
  Top Layer 1 w6: U7.8@2413.39,1611.93 2413.39,1581.61 v1(2440,1555)
  Top Layer 1 w10: U9.8@1510,1402.72 v1(1510,1455)
  RF Layer 3 w7: v1(1455,1045) 1475,1065 1475,1378.08 1510,1413.08 v1(1510,1455) ; v1(2345,1070) 2409.5,1134.5 2409.5,1248.08 2404.5,1253.08 2404.5,1519.5 v1(2440,1555)
  Signal Layer 5 w7: v1(1455,1045) 1482.68,1072.68 1563.88,1072.68 1567.19,1076 1706.62,1076 1716.12,1066.5 1743.88,1066.5 1763.69,1086.31 1864.31,1086.31 1883,1105 2115.4,1105 2150.4,1070 v1(2345,1070)
\CTRL_RX_HISEL: U2.7 U4.7 U9.2 | length 1620.8
  Top Layer 1 w7: v1(2085,2280) 2089.5,2284.5 2145.5,2284.5 2165.31,2264.69 U2.7@2181.61,2264.69 ; v1(2090,1960) 2104.5,1974.5 2145.5,1974.5 2165.31,1954.69 U4.7@2181.61,1954.69
  Top Layer 1 w10: v1(1760,1565) U9.2@1760,1617.28
  RF Layer 3 w7: v1(2085,2280) 2085,2252.58 2094.5,2243.08 2094.5,2219 2085.5,2210 2085.5,1964.5 v1(2090,1960)
  RF Layer 3 w10: v1(1760,1565) 1824,1629 1824,2221 v1(1795,2250)
  Signal Layer 5 w7: v1(1795,2250) 2055.93,2250 2085,2279.07 v1(2085,2280)
\CTRL_TX_HISEL: U8.7 U9.4 U12.7 | length 1346.5
  Top Layer 1 w7: v1@2095,1654.5 2145.5,1654.5 2165.31,1634.69 U8.7@2181.61,1634.69 ; v1(2157,1341) 2157,1338 2170.31,1324.69 U12.7@2186.61,1324.69
  Top Layer 1 w10: v1(1660,1565) U9.4@1660,1617.28
  RF Layer 3 w7: v1(2095,1655) 2134.5,1655 ; v1@2134.5,1750 2134.5,1655 ; v1(2157,1341) 2134.5,1363.5 2134.5,1655
  RF Layer 3 w10: v1(1660,1565) v1(1660,1775)
  Signal Layer 5 w10: v1(1660,1775) 1755.3,1775 1770.3,1760 1815,1760 1824.74,1769.74 2115.26,1769.74 v1(2135,1750)
\CTRL_TXSEL_CHA: U5.8 U9.10 | length 2590
  Top Layer 1 w7: v1(2342,1895) 2347,1890 U5.8@2371.61,1890
  Top Layer 1 w10: U9.10@1610,1402.72 v1(1610,1455)
  RF Layer 3 w7: v1(2575,1815) 2631.5,1758.5 2631.5,1264.36 2660.5,1235.36 2660.5,1060.5 v1(2645,1045)
  RF Layer 3 w10: v1(1610,1455) 1665,1400 1665,1080 v1(1695,1050)
  Signal Layer 5 w7: v1(1695,1050) 1772.42,1050 1791.92,1069.5 1919.5,1069.5 1943.5,1045.5 2566.82,1045.5 2590.5,1069.18 2620.82,1069.18 v1(2645,1045) ; v1(2342,1895) 2495,1895 v1(2575,1815)
\CTRL_TXSEL_CHB: U9.12 U11.8 | length 1381.5
  Top Layer 1 w7: v1(2310,1420) 2320,1410 U11.8@2371.61,1410
  Top Layer 1 w10: U9.12@1710,1402.72 v1(1710,1455)
  RF Layer 3 w7: v1(2310,1420) 2355,1375 2355,1303.58 2335,1283.58 2335,1255 2360,1230 2360,1155 v1(2345,1140)
  RF Layer 3 w10: v1(1710,1455) 1710,1190 v1(1763.26,1136.74)
  Signal Layer 5 w7: v1(1763.26,1136.74) 1776.52,1150 2130,1150 2150,1130 2335,1130 v1(2345,1140)
\RESET_LEDS: J7.8 U1.18 | length 2631.9
  Top Layer 1 w6: U1.18@1418.82,2289.21 1444.21,2289.21 1485,2330 v1(1535,2330)
  RF Layer 3 w7: v1(1455,1075) 1455,1380 1489,1414 1489,2146.42 1535,2192.42 v1(1535,2330) ; v1(2300,1250) 2302.58,1250 2331.35,1221.23 2331.35,1153.93 2320,1142.58 v1(2320,1090)
  Signal Layer 5 w7: v1(1455,1075) 1470,1090 1538.6,1090 1541.92,1086.68 1558.08,1086.68 1561.4,1090 1712.42,1090 1721.92,1080.5 1738.08,1080.5 1760.82,1103.24 1777.14,1103.24 1794.9,1121 2119.2,1121 2149.7,1090.5 v1@2320,1090.5
  Bottom Layer 6 w7: J7.8@2196.57,1300 2237.38,1300 2287.38,1250 v1(2300,1250)
CTRL_FDDEN_CHA: J6.10 U3.7 U9.5 | length 1644.8
  Top Layer 1 w6: U3.7@2390.31,2086.61 2390.31,2071.3 2404.62,2057 2415.3,2057 2429.18,2043.11 2433.76,2043.11 2465,2011.87 v1(2465,1990)
  Top Layer 1 w10: v1(1610,1565) U9.5@1610,1617.28
  RF Layer 3 w6: v1(1610,1565) 1610,1785 1699,1874 v1(1699,2090)
  Signal Layer 5 w6: v1@1700,2090 2045.22,2090 2064.22,2109 2196,2109 v1(2215,2090) 2215,2088.13 2243.13,2060 2360,2060 2434,1986 2461,1986 v1(2465,1990)
  Bottom Layer 6 w6: J6.10@2196.57,2150 2196.57,2108.43 v1(2215,2090)
CTRL_FDDEN_CHB: J6.11 U7.7 U9.9 | length 2451.6
  Top Layer 1 w6: U7.7@2393.7,1611.93 2393.7,1561.3 v1(2400,1555)
  Top Layer 1 w10: U9.9@1560,1402.72 v1(1560,1455)
  RF Layer 3 w6: v1(2240,2090) 2240,2020 2219,1999 2219,1674.13 2247.26,1674.13 2252.13,1679 2267.87,1679 2272.74,1674.13 2390.87,1674.13 2400,1665 v1(2400,1555)
  RF Layer 3 w7: v1(1560,1455) 1540.5,1474.5 1540.5,1745.5 1577.5,1782.5 1577.5,1916.59 1666.5,2005.59 v1(1666.5,2206.5)
  Bottom Layer 6 w6: v1(1666.5,2206.5) 1690,2230 1905,2230 1929,2254 2082.87,2254 2090.87,2246 2196.57,2246 J6.11@2196.57,2250 2240,2250 2230,2240 2230,2195 2244.33,2180.67 2263.71,2180.67 2269.57,2174.81 2269.57,2119.57 v1(2240,2090)
CTRL_RX_HISEL: J6.8 U2.8 U4.8 U9.1 | length 1281
  Top Layer 1 w7: v1(2110,2265) 2120.88,2254.12 2149.19,2254.12 2158.31,2245 U2.8@2181.61,2245 ; v1(2115,1955) 2140,1955 2160,1935 U4.8@2181.61,1935
  Top Layer 1 w10: v1(1810,1565) U9.1@1810,1617.28
  RF Layer 3 w7: v1(1810,1565) 1845,1600 v1(1845,1930) ; v1(2110,2265) 2129.5,2245.5 2129.5,1969.5 v1(2115,1955)
  Signal Layer 5 w7: v1(1845,1930) 2052.42,1930 2061.92,1939.5 2099.5,1939.5 v1(2115,1955) ; v1(2110,2265) v1@2114.5,2260.5
  Bottom Layer 6 w7: v1(2115,1955) 2191.57,1955 J6.8@2196.57,1950
CTRL_TX_HISEL: J6.9 U8.8 U9.3 U12.8 | length 1553.2
  Top Layer 1 w7: v1@2110,1325 v1(2114,1325) 2145,1325 2165,1305 U12.8@2186.61,1305 ; v1(2115,1635) 2140,1635 2160,1615 U8.8@2181.61,1615
  Top Layer 1 w10: v1(1710,1565) U9.3@1710,1617.28
  RF Layer 3 w7: v1@2115,1326 v1(2115,1635) 2087.42,1635 2075.5,1646.92 2075.5,1850.5 2143.5,1918.5 2143.5,2078.5 v1(2155,2090)
  Signal Layer 5 w10: v1(1710,1565) 1767.74,1622.74 2053.29,1622.74 2064.55,1634 2114,1634 v1(2115,1635)
  Bottom Layer 6 w7: v1(2155,2090) 2190,2090 2196.57,2083.43 J6.9@2196.57,2050
CTRL_TXSEL_CHA: J7.2 U5.7 U9.11 | length 2207.8
  Top Layer 1 w7: v1@2325,1915 2350,1915 2355.31,1909.69 U5.7@2371.61,1909.69
  Top Layer 1 w10: U9.11@1660,1402.72 v1(1660,1455)
  RF Layer 3 w7: v1(1660,1455) 1689,1484 1689,1829 v1(1735,1875)
  Signal Layer 5 w7: v1@2085,1435 v1(2085,1433) 2085,1385.42 2170.42,1300 v1(2485,1300)
  Bottom Layer 6 w7: v1(1660,1455) 1681,1476 1935.95,1476 1946.71,1465.24 2053.29,1465.24 2085,1433.53 v1(2085,1433) ; v1(1735,1875) 1850,1875 1910,1935 2057.42,1935 2061.92,1939.5 2078.08,1939.5 2103.08,1914.5 2324.5,1914.5 v1(2325,1914) ; J7.2@2393.43,1300 v1(2485,1300)
CTRL_TXSEL_CHB: J7.5 U9.13 U11.7 | length 1373.2
  Top Layer 1 w7: v1(2298.37,1458.5) 2299.08,1458.5 2327.89,1429.69 U11.7@2371.61,1429.69
  Top Layer 1 w10: U9.13@1760,1402.72 v1(1760,1455)
  RF Layer 3 w7: v1(2300,1225) 2284.5,1225 2270,1239.5 2270,1257.58 2245.5,1282.08 2245.5,1405.63 v1(2298.37,1458.5) 2280.5,1476.37 2280.5,1553.08 2297.42,1570 v1(2300,1570)
  Bottom Layer 6 w7: v1(1760,1455) 1760,1374 1789.5,1344.5 1858.08,1344.5 1869.5,1333.08 1869.5,1325.5 1895,1300 2065,1300 2129.5,1235.5 2199.5,1235.5 2223.5,1259.5 2258.08,1259.5 2269.5,1248.08 2269.5,1240 2284.5,1225 v1(2300,1225) v1@2300,1227.58 ; v1(2300,1570) 2320,1570 2350,1600 J7.5@2393.43,1600